# EAGLE board PPR_servo (EAGLE 6.5.0)
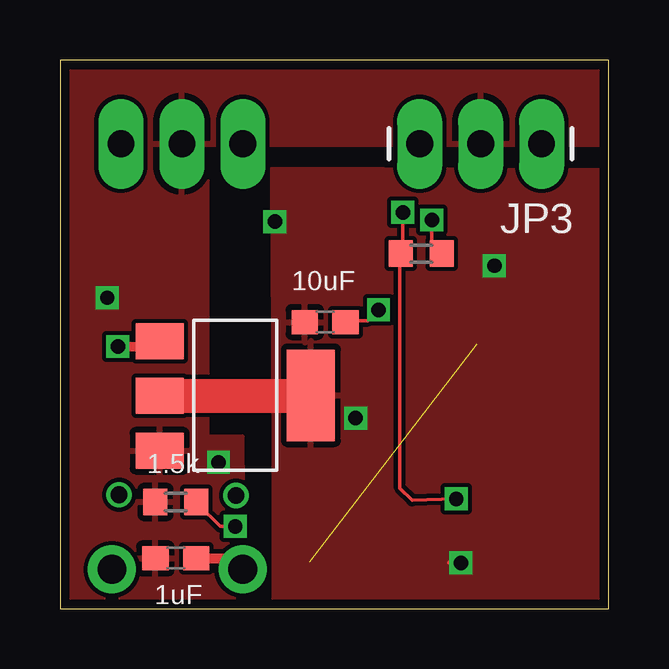
[diagram p0: board, top side]
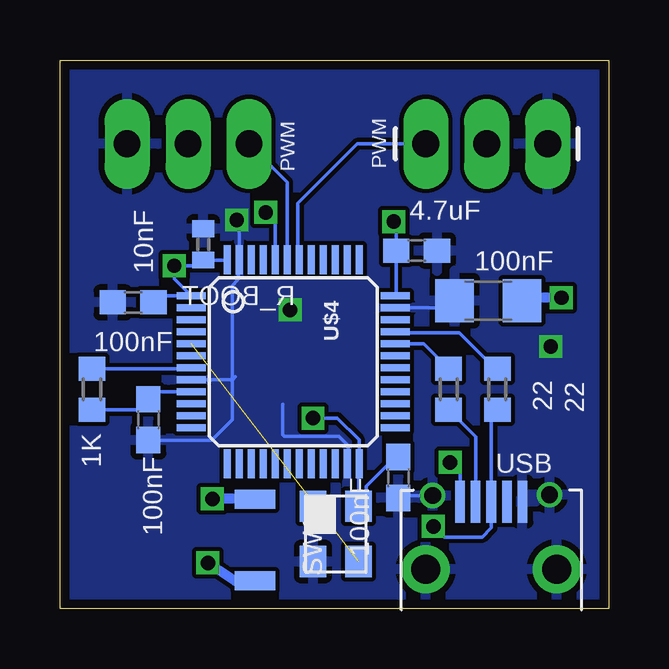
[diagram p1: board, bottom side, seen from below]

Size 22.86 x 22.86 mm. Coordinates in mm from the lower left corner, seen from the top.
Outline: 0,0 22.86,0 22.86,22.86 0,22.86 0,0
Copper layers (1*16): Top 0.0356mm / dielectric 1.5011mm / Bottom 0.0356mm
Design rules "LaenPCBOrder *": minimum track width 5mil, minimum drill 13mil, track to track 6mil, track to pad 6mil, pad to pad 6mil, via to via 6mil, smd to smd 6mil, copper to edge 15mil, drill to drill 6mil, minimum pad ring 7mil, minimum via ring 7mil, stop-mask expansion 4mil, vias tented up to drill 0mil, thermal gap 10mil
Net classes: 0 default: width 0.178 mm, drill 0.381 mm, clearance 0.178 mm

## Footprints (pad centres in the part's own frame; a part is rotated, then mirrored left to right if it is on the bottom)
C0402 = smd 0.7 x 0.9: 1 -0.65,0; 2 0.65,0
C1206 = smd 1.6 x 1.8: 1 -1.4,0; 2 1.4,0
C0603 = smd 1.1 x 1: 1 -0.85,0; 2 0.85,0
FCI-10103594-0001LF = smd 0.4 x 1.75: 1 -1.3,4.525; 2 -0.65,4.525; 3 0,4.525; 4 0.65,4.525; 5 1.3,4.525 | drill 0.7: P$1 -2.443,4.776; P$2 2.428,4.806 | drill 1.2 pad 2: P$3 -2.725,1.7; P$4 2.725,1.7
1X03_LONGPADS = drill 1.118 pad 1.88 long: 1 0,0; 2 2.54,0; 3 5.08,0
R0603 = smd 1 x 1.1: 1 -0.85,0; 2 0.85,0
B3U = smd 0.8 x 1.7: P$1 -1.7,0; P$2 1.7,0
LQFP48 = smd 0.3 x 1.2: 1 -2.75,-4.25; 2 -2.25,-4.25; 3 -1.75,-4.25; 4 -1.25,-4.25; 5 -0.75,-4.25; 6 -0.25,-4.25; 7 0.25,-4.25; 8 0.75,-4.25; 9 1.25,-4.25; 10 1.75,-4.25; 11 2.25,-4.25; 12 2.75,-4.25; 25 2.75,4.25; 26 2.25,4.25; 27 1.75,4.25; 28 1.25,4.25; 29 0.75,4.25; 30 0.25,4.25; 31 -0.25,4.25; 32 -0.75,4.25; 33 -1.25,4.25; 34 -1.75,4.25; 35 -2.25,4.25; 36 -2.75,4.25 | smd 1.2 x 0.3: 13 4.25,-2.75; 14 4.25,-2.25; 15 4.25,-1.75; 16 4.25,-1.25; 17 4.25,-0.75; 18 4.25,-0.25; 19 4.25,0.25; 20 4.25,0.75; 21 4.25,1.25; 22 4.25,1.75; 23 4.25,2.25; 24 4.25,2.75; 37 -4.25,2.75; 38 -4.25,2.25; 39 -4.25,1.75; 40 -4.25,1.25; 41 -4.25,0.75; 42 -4.25,0.25; 43 -4.25,-0.25; 44 -4.25,-0.75; 45 -4.25,-1.25; 46 -4.25,-1.75; 47 -4.25,-2.25; 48 -4.25,-2.75
SOT-223 = smd 1.499 x 2.007: 1 -2.261,-3.15; 2 0.025,-3.15; 3 2.311,-3.15 | smd 3.81 x 2.007: 4 0,3.15
ASTX-H11 = smd 1.3 x 1.1: P$1 -1.15,-0.95; P$2 1.15,-0.95; P$3 1.15,0.95; P$4 -1.15,0.95

## Placement (x,y rotation side)
C6  10 nF  [C0402]  16.89,15.18 90 bottom
C_BYP_IN_1  100nF  [C1206]  5.02,12.83 180 bottom
C_BYP_OUT_1  10µF  [C0603]  11.05,11.94 0 top
C_MC_VDD_1_1  4.7uF  [C0603]  8,14.92 0 bottom
C_MC_VDD_2_1  100nF  [C0603]  19.81,12.76 180 bottom
C_MC_VDD_3_1  100nF  [C0603]  8.76,5.46 270 bottom
C_MC_VDDA_1  100nF  [C0603]  19.18,7.87 270 bottom
C_USB_DC1  1µF  [C0603]  4.83,2.1 0 top
CN2  USB-RECEPTABLE  [FCI-10103594-0001LF]  4.89,-0.06 0 bottom
JP1  [1X03_LONGPADS]  2.54,19.37 180 bottom
JP3  [1X03_LONGPADS]  20.07,19.37 180 top
R1  22  [R0603]  4.64,9.14 90 bottom
R2  1.5k  [R0603]  4.83,4.45 0 top
R3  22  [R0603]  6.67,9.14 90 bottom
R_BOOT_PU_1  1k  [R0603]  15.05,14.8 0 top
R_NRST_PU_1  1k  [R0603]  21.53,9.14 90 bottom
SW1  B3U  [B3U]  14.73,2.86 270 bottom
U$4  STM32F303CX  [LQFP48]  13.14,10.29 270 bottom
U$48  REG_SOT223LD1117XX  [SOT-223]  7.3,8.89 270 top
U$54  ASTX-H11  [ASTX-H11]  11.37,3.11 270 bottom

## Library data of the parts
C6 = rcl
C_BYP_IN_1 C_BYP_OUT_1 C_MC_VDD_1_1 C_MC_VDD_2_1 C_MC_VDD_3_1 C_MC_VDDA_1 C_USB_DC1 R1-R3 R_BOOT_PU_1 R_NRST_PU_1 = resistor
CN2 = neels
JP1 JP3 = SparkFun
SW1 = zz-upenn
U$4 U$48 = piccoli
U$54 = block_parts

## Nets
3_3V,+,1: C6.1 C_BYP_OUT_1.1 C_MC_VDD_1_1.1 C_MC_VDD_2_1.1 C_MC_VDD_3_1.1 SW1.P$2 U$4.1 U$4.24 U$4.36 U$4.48 U$48.2 U$48.4 U$54.P$4
3_3V,+,I: C_MC_VDDA_1.1 R_NRST_PU_1.1 U$4.9
5V_USB,+,1: C_BYP_IN_1.1 C_USB_DC1.1 CN2.1 JP1.2 JP3.2 R2.1 U$48.3
16MHZ_CMOS,#,+,O,OSCILLATOR: U$4.5 U$54.P$3
BOOT0_1: R_BOOT_PU_1.1 SW1.P$1 U$4.44
D+,-,USB,1: R1.2 U$4.33
D+_IN_1: CN2.3 R1.1 R2.2
D-,-,USB,1: R3.2 U$4.32
D-_IN_1: CN2.2 R3.1
GND: C6.2 C_BYP_IN_1.2 C_BYP_OUT_1.2 C_MC_VDD_1_1.2 C_MC_VDD_2_1.2 C_MC_VDD_3_1.2 C_MC_VDDA_1.2 C_USB_DC1.2 CN2.5 CN2.P$1 CN2.P$2 CN2.P$3 CN2.P$4 JP1.1 JP3.1 R_BOOT_PU_1.2 U$4.8 U$4.23 U$4.35 U$4.47 U$48.1 U$54.P$2
GPIO,#,+,IO.B,2: U$4.20
GPIO,#,+,IO.B,12: U$4.25
GPIO,#,+,IO.C,14: U$4.3
GPIO,#,+,IO.C,15: U$4.4
GPIO,#,+,IO/PWM,1,+,IO,TIMER,1,6/QEP,1,-,I,TIMER,1,6.A,8: U$4.29
GPIO,#,+,IO/PWM,1,+,IO,TIMER,15,1/MISO,#,+,IO,SPI,2,5/PWM_N,2,+,O,TIMER,1,6.B,14: U$4.27
GPIO,#,+,IO/PWM,1,+,O,TIMER,16,1/PWM,3,+,IO,TIMER,4,2/SCL,#,+,IO,I2C,1,4/PWM,2,+,IO,TIMER,8,10/QEP,2,-,I,TIMER,8,10.B,8: U$4.45
GPIO,#,+,IO/PWM,1,+,O,TIMER,16,1/QEP,1,-,I,TIMER,3,2/PWM,1,+,IO,TIMER,3,2/MISO,#,+,IO,SPI,1,5.A,6: U$4.16
GPIO,#,+,IO/PWM,1,+,O,TIMER,17,1/PWM,4,+,IO,TIMER,4,2/SDA,#,+,IO,I2C,1,4/PWM,3,+,IO,TIMER,8,10.B,9: U$4.46
GPIO,#,+,IO/PWM,1,+,O,TIMER,17,1/QEP,2,-,I,TIMER,3,2/PWM,1,+,IO,TIMER,3,2/PWM_N,1,+,O,TIMER,8,4/PWM_N,1,+,O,TIMER,1,6/MOSI,#,+,IO,SPI,1,5.A,7: U$4.17
GPIO,#,+,IO/PWM,2,+,IO,TIMER,2,1/QEP,2,-,I,TIMER,2,1/PWM_N,1,+,O,TIMER,8,4/SCK,#,+,IO,SPI,1,5/SCK,#,+,IO,SPI,3,6/TXRX,#,-,O,UART,2,7.B,3: U$4.39
GPIO,#,+,IO/PWM,2,+,IO,TIMER,3,2/QEP,2,-,I,TIMER,3,2/PWM_N,3,+,O,TIMER,8,3/MOSI,#,+,IO,SPI,1,5/MOSI,#,+,IO,SPI,3,6/PWM,1,+,O,TIMER,17,10.B,5: U$4.41
GPIO,#,+,IO/PWM,2,+,IO,TIMER,15,1/PWM_N,1,+,O,TIMER,15,2/MOSI,#,+,IO,SPI,2,5/PWM_N,3,+,O,TIMER,1,4.B,15: U$4.28
GPIO,#,+,IO/PWM,3,+,IO,TIMER,2,1/TXRX,#,-,O,UART,2,7/QEP,1,-,I,TIMER,15,9/PWM,1,+,IO,TIMER,15,9.A,2: U$4.12
GPIO,#,+,IO/PWM,3,+,IO,TIMER,2,1/TXRX,#,-,O,UART,3,7.B,10: U$4.21
GPIO,#,+,IO/PWM,3,+,IO,TIMER,3,2/PWM_N,2,+,O,TIMER,8,4/PWM_N,2,+,O,TIMER,1,6.B,0: U$4.18
GPIO,#,+,IO/PWM,4,+,IO,TIMER,2,1/TXRX,#,-,I,UART,2,7/QEP,2,-,I,TIMER,15,9/PWM,2,+,IO,TIMER,15,9.A,3: U$4.13
GPIO,#,+,IO/PWM,4,+,IO,TIMER,2,1/TXRX,#,-,I,UART,3,7.B,11: U$4.22
GPIO,#,+,IO/PWM,4,+,IO,TIMER,3,2/PWM_N,3,+,O,TIMER,8,4/PWM_N,3,+,O,TIMER,1,6.B,1: U$4.19
GPIO,#,+,IO/PWM_N,1,+,O,TIMER,1,4.C,13: U$4.2
GPIO,#,+,IO/QEP,1,-,I,TIMER,2,1/PWM,1,+,IO,TIMER,2,1.A,0: U$4.10
GPIO,#,+,IO/QEP,1,-,I,TIMER,2,1/PWM,1,+,IO,TIMER,2,1/SCK,#,+,IO,SPI,1,5.A,5: U$4.15
GPIO,#,+,IO/QEP,2,-,I,TIMER,2,1/PWM,2,+,IO,TIMER,2,1/PWM_N,1,+,O,TIMER,15,9/.A,1: U$4.11
GPIO,#,+,IO/QEP,2,-,I,TIMER,3,2/PWM,2,+,IO,TIMER,3,2.A,4: U$4.14
GPIO,#,+,IO/SCK,#,+,IO,SPI,2,5/PWM_N,1,+,O,TIMER,1,6.B,13: U$4.26
GPIO,#,+,IO/SCL,#,+,IO,I2C,2,4.F,1: U$4.6
GPIO,#,+,IO/SCL,+,IO,I2C,2,4/PWM,2,+,IO,TIMER,1,6/QEP,2,+,I,TIMER,1,6/TXRX,-,O,UART,1,7/PWM,3,+,IO,TIMER,2,10.A,9: U$4.30
GPIO,#,+,IO/SDA,+,IO,I2C,2,4/PWM,3,+,IO,TIMER,1,6/TXRX,-,I,UART,1,7/PWM,4,+,IO,TIMER,2,10.A,10: U$4.31
NRST_1: R_NRST_PU_1.2 U$4.7
TIMER,PWM,-,1: JP1.3 U$4.42
TIMER,PWM,-,2: JP3.3 U$4.43

## Tracks (layer width: path | path; a pad name or v marks a point on that pad's centre or on a via)
3_3V,+,1  (via drill 0.6)
  Top 0.152: v12.32,7.94 12.38,7.87 | v16.7,1.91 16.19,1.91 16.38,2.1
  Top 1.422: U$48.2 10.43,8.87 U$48.4
  Bottom 0.152: U$4.36 8.85,13.08 C_MC_VDD_1_1.1 8.85,16.03 v8.95,16.13 | U$4.48 15.9,14.53 C6.1 17.13,14.29 v18.1,14.29 18.1,13.74 U$4.1 18.92,13.04 C_MC_VDD_2_1.1 | v12.32,7.94 11.3,7.94 10.39,7.03 U$4.24 10.42,6.04 U$54.P$4 10.42,4.13 10.1,3.81 10.1,5.09 8.7,6.49 8.7,6.38 C_MC_VDD_3_1.1 | SW1.P$2 15.57,1.16
  Bottom 0.406: 15.57,1.16 v16.7,1.91
  pour Top: 22.86,0 8.89,0 8.89,7.62 8.83,18.35 22.86,18.29
3_3V,+,I
  Bottom 0.152: U$4.9 18.86,9.04 C_MC_VDDA_1.1 19.61,8.29 R_NRST_PU_1.1
5V_USB,+,1  (via drill 0.6)
  Bottom 0.152: 6.19,3.91 CN2.1 6.19,5.68 v6.6,6.1 | 3.49,12.95 C_BYP_IN_1.1
  Bottom 0.406: v1.97,12.95 3.49,12.95
  pour Top: 7.68,0 7.62,7.18 6.16,7.18 6.16,19.3 22.73,19.3 22.8,24.57 -0.57,24.51 -0.19,0
16MHZ_CMOS,#,+,O,OSCILLATOR  (1 unrouted)
BOOT0_1  (via drill 0.6)
  Top 0.152: v16.51,4.57 14.67,4.51 14.16,5.02 14.16,14.76 R_BOOT_PU_1.1 14.29,14.88 v14.29,16.51
  Bottom 0.152: U$4.44 13.89,16.12 v14.29,16.51 | SW1.P$1 14.75,4.57
  Bottom 0.406: 14.75,4.57 v16.51,4.57
D+,-,USB,1
  Bottom 0.152: R1.2 4.72,9.99 6.22,11.49 8.85,11.49 U$4.33
D+_IN_1  (via drill 0.6)
  Top 0.152: R2.2 5.74,4.36 6.67,3.43 v7.3,3.43
  Bottom 0.152: R1.1 4.64,8.06 4.89,7.81 CN2.3 4.89,3.37 5.27,2.98 6.86,2.98 v7.3,3.43
D-,-,USB,1
  Bottom 0.152: 6.69,9.99 R3.2 7.71,11.04 U$4.32
D-_IN_1
  Bottom 0.152: CN2.2 5.54,7.17 R3.1
GND  (via drill 0.6)
  Top 0.152: U$48.1 4.09,10.9 | 7.16,2.1 CN2.P$3 | v15.49,16.19 15.49,15.2 R_BOOT_PU_1.2 | C_BYP_OUT_1.2 11.96,12 12.83,12 v13.27,12.45
  Top 0.406: 4.09,10.9 v2.41,10.92 | C_USB_DC1.2 7.16,2.1 | 7.33,1.92 CN2.P$3
  Bottom 0.152: U$4.35 6.71,12.54 C_BYP_IN_1.2 | U$54.P$2 12.32,2.42 | U$4.47 15.39,16.09 v15.49,16.19 | U$4.8 15.67,9.54 15.56,9.65 | C_MC_VDDA_1.2 16.54,7.02 15.68,7.87 15.68,13.46 15.43,13.72 15.43,14.33 | CN2.P$1 8.66,4.71 C_MC_VDD_3_1.2 | U$4.23 10.86,6.07 10.86,6.79 11.24,7.18 13.53,7.18 13.59,7.24 13.59,8.51
  pour Bottom: -0.57,25.02 -0.25,-1.02 25.34,-0.95 25.53,25.15
NRST_1
  Bottom 0.152: R_NRST_PU_1.2 17.44,9.99 U$4.7
TIMER,PWM,-,1
  Bottom 0.152: JP1.3 10.48,19.37 12.95,16.89 12.95,14.6 U$4.42
TIMER,PWM,-,2
  Bottom 0.152: U$4.43 13.39,17.78 JP3.3

## Text on the board
tNames: 10uF | 1.5k | 1uF
bNames: PWM | PWM | 4.7uF | 100nF | 10nF | R_BOOT | 100nF | 22 | 22 | 1K | USB | 100nF | SW1 | 100nF